# Altium PCB LEDCube.PcbDoc (part 2 of 2)
Units mil, origin at the board's own origin, x right, y up, seen from the top; angles counter-clockwise.
Board outline 4000 x 4000 mil, 4 copper layers (Top Layer, GND, +5, Bottom Layer); 176 components, 214 nets, 658 pads, 213 vias.
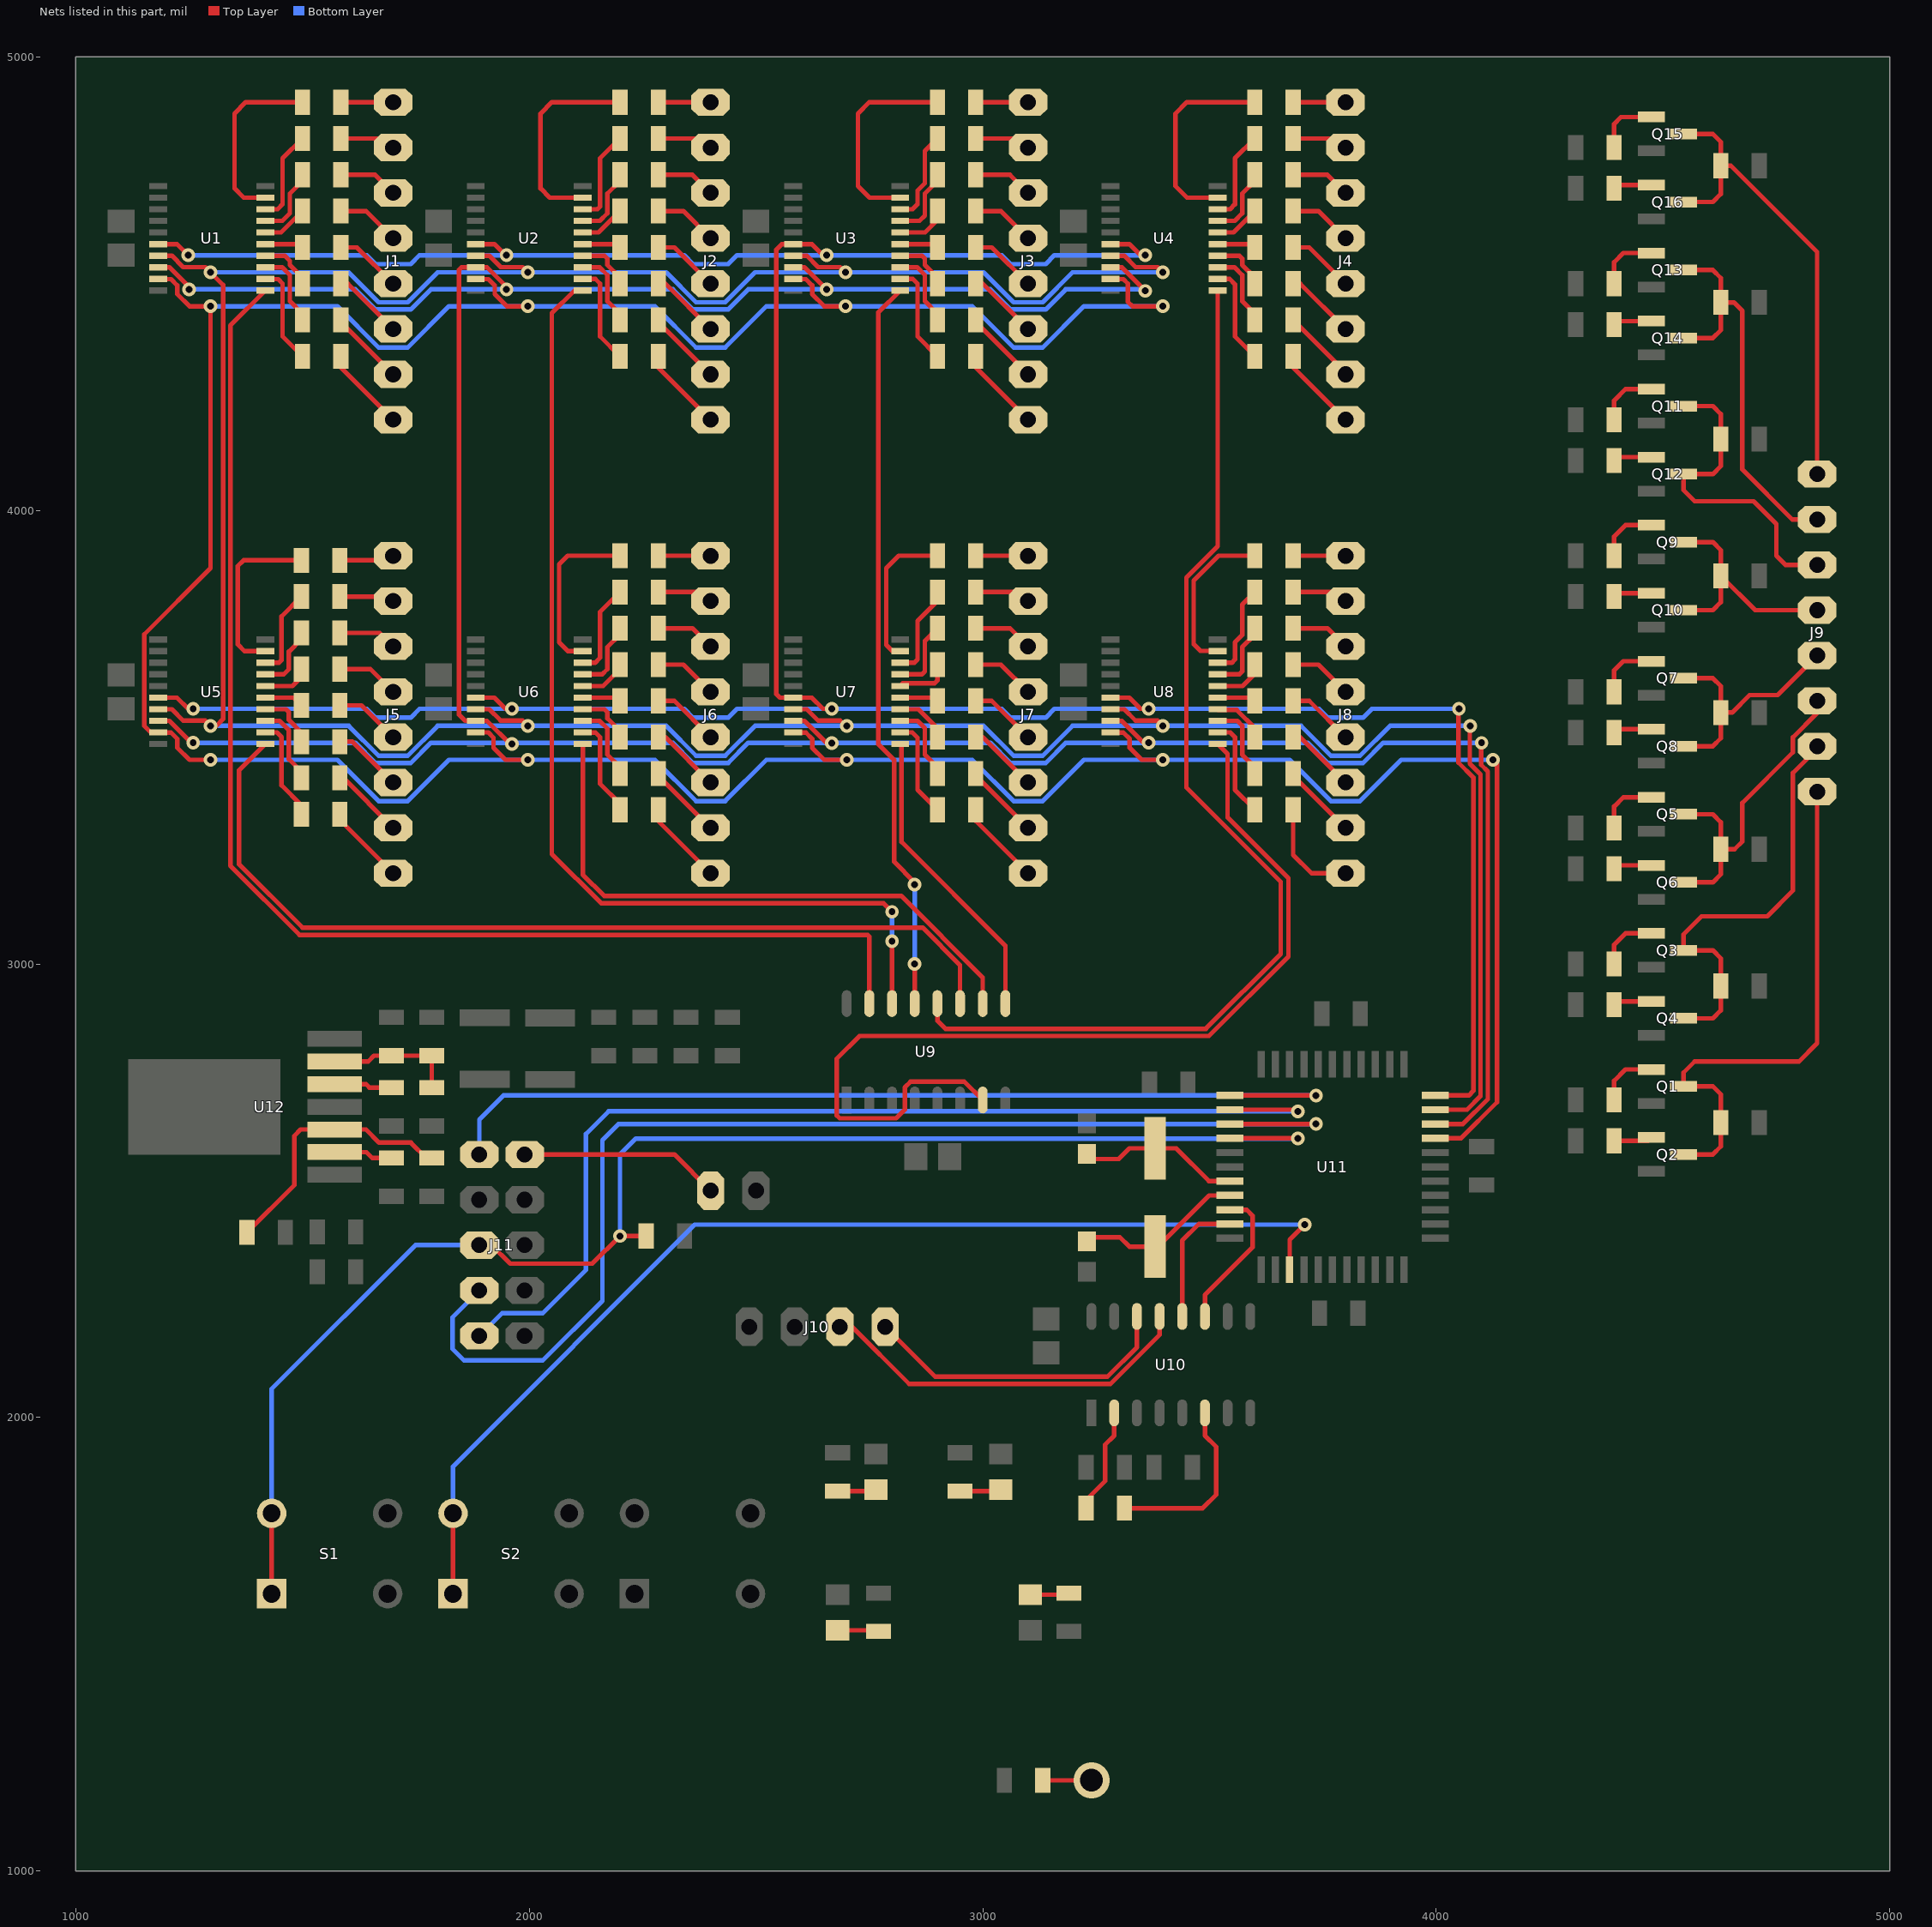
[diagram p4: the nets of this part, all layers, seen from the top]

## Via types
v1: diameter 30, hole 15, Top Layer to Bottom Layer, 205 vias
v2: diameter 80, hole 50, Top Layer to Bottom Layer, 3 vias
v3: diameter 400, hole 260, Top Layer to Bottom Layer, 2 vias
v4: diameter 100, hole 55, Top Layer to Bottom Layer, 2 vias
v5: diameter 50, hole 28, Top Layer to Bottom Layer, 1 vias

## Nets (pads, with @x,y where several pads share a name; then routed paths per layer and width w, separated by ;. In a path a pad name is that pad's centre, name@x,y a point inside that pad or via, vN(x,y) a via of type N, cw(c..) or ccw(c..) an arc to the next point about the centre after c; other vN are vias at no path point) (continued)
LINE5: U1.6 U2.6 U3.6 U4.6 U5.6 U6.6 U7.6 U8.6 U11.33 | length 7682.6
  Top Layer w10: U5.6@1181.89,3587.2 1223.09,3587.2 v1@1247.8,3562.5 ; U1.6@1181.89,4587.2 1223.09,4587.2 v1(1247.8,4562.5) ; U6.6@1881.89,3587.2 1923.09,3587.2 1947.8,3562.5 v1(1962,3562.5) ; U2.6@1881.89,4587.2 1923.09,4587.2 v1@1947.8,4562.5 ; v1@2647.5,4562.8 2623.09,4587.2 U3.6@2581.89,4587.2 2557.2,4587.2 2545,4575 2545,3595 2552.8,3587.2 U7.6@2581.89,3587.2 2623.09,3587.2 2647.8,3562.5 v1(2667,3562.5) ; U8.6@3281.89,3587.2 3323.09,3587.2 3347.8,3562.5 v1(3366,3562.5) ; U4.6@3281.89,4587.2 3323.09,4587.2 v1@3347.8,4562.5 ; U11.33@3997.76,2710 4071.82,2710 4081.82,2720 4081.82,3411.15 4049,3443.98 4049,3561.5 v1(4050,3562.5)
  Bottom Layer w10: v1(1247.8,4562.5) 1247.2,4562.5 1641.82,4562.5 1661.32,4543 1738.68,4543 1758.18,4562.5 2341.82,4562.5 2361.32,4543 2438.68,4543 2458.18,4562.5 3041.82,4562.5 3061.32,4543 3138.68,4543 3158.18,4562.5 v1(3358,4562.5) ; v1(1259,3562.5) 1641.82,3562.5 1661.32,3543 1738.68,3543 1758.18,3562.5 2341.82,3562.5 2361.32,3543 2438.68,3543 2458.18,3562.5 2650,3562.5 3041.82,3562.5 3061.32,3543 3138.68,3543 3158.18,3562.5 3347.8,3562.5 3741.82,3562.5 3761.32,3543 3838.68,3543 3858.18,3562.5 v1(4050,3562.5)
  other v1: 1950,4562.5 2656,4562.5
LINE6: U1.7 U2.7 U3.7 U4.7 U5.7 U6.7 U7.7 U8.7 U11.32 | length 8256.5
  Top Layer w10: U5.7@1181.89,3561.61 1211.92,3561.61 1237.03,3536.5 1285.71,3536.5 v1(1297.21,3525) 1310,3525 1325,3540 1325,4497.21 1285.71,4536.5 1237.03,4536.5 1211.92,4561.61 U1.7@1181.89,4561.61 ; U6.7@1881.89,3561.61 1911.92,3561.61 1937.03,3536.5 1985.71,3536.5 v1(1997.21,3525) ; U2.7@1881.89,4561.61 1911.92,4561.61 1937.03,4536.5 1985.71,4536.5 v1(1997.21,4525) ; U7.7@2581.89,3561.61 2611.92,3561.61 2637.03,3536.5 2685.71,3536.5 v1@2697.21,3525 ; U3.7@2581.89,4561.61 2611.92,4561.61 2637.03,4536.5 2685.71,4536.5 ; U8.7@3281.89,3561.61 3311.92,3561.61 3337.03,3536.5 3385.71,3536.5 v1(3397.21,3525) ; U4.7@3281.89,4561.61 3311.92,4561.61 3337.03,4536.5 3385.71,4536.5 v1(3397.21,4525) ; U11.32@3997.76,2678.5 4067.89,2678.5 4097.82,2708.44 4097.82,3417.78 4074,3441.6 v1@4074,3524
  Bottom Layer w10: v1(1297.21,3525) 1601.94,3525 1667.94,3459 1732.06,3459 1798.06,3525 v1(1997.21,3525) 2301.94,3525 2367.94,3459 2432.06,3459 2498.06,3525 v1(2700,3525) 3001.94,3525 3067.94,3459 3132.06,3459 3198.06,3525 v1(3397.21,3525) 3701.94,3525 3767.94,3459 3832.06,3459 3898.06,3525 v1(4075,3525) ; v1(1297.21,4525) 1601.94,4525 1667.94,4459 1732.06,4459 1798.06,4525 v1(1997.21,4525) 2301.94,4525 2367.94,4459 2432.06,4459 2498.06,4525 v1(2697.21,4525) 3001.94,4525 3067.94,4459 3132.06,4459 3198.06,4525 v1(3397.21,4525)
LINE7: U1.8 U2.8 U3.8 U4.8 U5.8 U6.8 U7.8 U8.8 U11.31 | length 7968.2
  Top Layer w10: U5.8@1181.89,3536.02 1206.61,3536.02 1250,3492.63 v1@1250,3487.5 ; U1.8@1181.89,4536.02 1206.61,4536.02 1250,4492.63 v1(1250,4487.5) ; v1(1950,4487.5) 1950,4492.63 1906.61,4536.02 U2.8@1881.89,4536.02 1851.02,4536.02 1845,4530 1845,3550 1858.98,3536.02 U6.8@1881.89,3536.02 1906.61,3536.02 v1@1959.81,3482.81 ; U7.8@2581.89,3536.02 2606.61,3536.02 2655.63,3487 v1(2667,3487) ; U3.8@2581.89,4536.02 2606.61,4536.02 v1@2650,4492.63 ; U8.8@3281.89,3536.02 3306.61,3536.02 3354.63,3488 v1(3366,3488) ; U4.8@3281.89,4536.02 3306.61,4536.02 3350,4492.63 v1@3350,4487.5 ; U11.31@3997.76,2647.01 4059.02,2647.01 4113.82,2701.81 4113.82,3424.41 4099,3439.23 4099,3486.5 v1(4100,3487.5)
  Bottom Layer w10: v1(1250,4487.5) 1247.2,4487.5 1616.82,4487.5 1661.32,4443 1738.68,4443 1783.18,4487.5 2316.82,4487.5 2361.32,4443 2438.68,4443 2483.18,4487.5 3016.82,4487.5 3061.32,4443 3138.68,4443 3183.18,4487.5 3354.5,4487.5 v1(3358,4484) ; v1@1259,3487.5 1616.82,3487.5 1661.32,3443 1738.68,3443 1783.18,3487.5 2316.82,3487.5 2361.32,3443 2438.68,3443 2483.18,3487.5 v1@2666.5,3487.5 ; v1(2667,3487) v1@2666.5,3487.5 ; v1(4100,3487.5) 3883.18,3487.5 3838.68,3443 3761.32,3443 3716.82,3487.5 3183.18,3487.5 3138.68,3443 3061.32,3443 3016.82,3487.5 v1@2666.5,3487.5
  other v1: 1962,3485 1259,3488 2656,4487
LINE8: U1.9 U2.9 U3.9 U4.9 U5.9 U6.9 U7.9 U8.9 U11.30 | length 8632.1
  Top Layer w10: U1.9@1181.89,4510.43 1182.32,4510 1210,4510 1224,4496 1224,4476.73 1250.73,4450 v1(1297.21,4450) 1297.21,3872.61 1151.2,3726.6 1151.2,3524.57 1165.35,3510.43 U5.9@1181.89,3510.43 1182.32,3510 1210,3510 1224,3496 1224,3476.73 1250.73,3450 v1(1297.21,3450) ; U6.9@1881.89,3510.43 1909.57,3510.43 1921.2,3498.8 1921.2,3476.73 1947.93,3450 v1(1997.21,3450) ; U2.9@1882.32,4510 1910,4510 1924,4496 1924,4476.73 1950.73,4450 v1(1997.21,4450) ; U7.9@2581.89,3510.43 2582.32,3510 2610,3510 2624,3496 2624,3476.73 2650.73,3450 v1@2697.21,3450 ; U3.9@2581.89,4510.43 2582.32,4510 2610,4510 2624,4496 2624,4476.73 2650.73,4450 v1(2697.21,4450) ; U8.9@3281.89,3510.43 3282.32,3510 3310,3510 3324,3496 3324,3476.73 3350.73,3450 v1(3397.21,3450) ; U4.9@3281.89,4510.43 3282.32,4510 3310,4510 3320,4500 3320,4460 3330,4450 v1(3397.21,4450) ; U11.30@3997.76,2615.51 4054.51,2615.51 4134,2695 4134,3441 v1(4125,3450)
  Bottom Layer w10: v1(1297.21,3450) 1576.94,3450 1667.94,3359 1732.06,3359 1823.06,3450 2276.94,3450 2367.94,3359 2432.06,3359 2523.06,3450 v1(2700,3450) 2976.94,3450 3067.94,3359 3132.06,3359 3223.06,3450 v1(3397.21,3450) 3676.94,3450 3767.94,3359 3832.06,3359 3923.06,3450 v1(4125,3450) ; v1(1297.21,4450) 1576.94,4450 1667.94,4359 1732.06,4359 1823.06,4450 v1(1997.21,4450) 2276.94,4450 2367.94,4359 2432.06,4359 2523.06,4450 v1(2697.21,4450) 2976.94,4450 3067.94,4359 3132.06,4359 3223.06,4450 v1(3397.21,4450)
MISO: J11.5 U11.2 | length 2332.3
  Top Layer w10: U11.2@3545,2678.5 v1@3691.5,2678.5
  Bottom Layer w10: J11.5@1890,2180 1940,2230 2030,2230 2125,2325 2125,2625 2175,2675 v1(3695,2675)
MOSI: J11.1 U11.1 | length 2134
  Top Layer w10: U11.1@3545,2710 v1(3735,2710)
  Bottom Layer w10: J11.1@1890,2580 1890,2657 1943,2710 v1(3735,2710)
NetC28_2: C28.2 R95.2 R97.1 U12.6 | length 289.8
  Top Layer w10: U12.6@1571,2785 1645,2785 1657.8,2797.8 C28.2@1696,2797.8 R95.2@1785,2797.8 R97.1@1785,2727.32
NetC29_2: C29.2 U12.5 | length 128.2
  Top Layer w10: U12.5@1571,2735 1640,2735 1647.68,2727.32 C29.2@1696,2727.32
NetJ1_1: J1.1 R1.2 | length 115.4
  Top Layer w10: R1.2@1584.65,4900 J1.1@1700,4900
NetJ1_2: J1.2 R5.2 | length 123.6
  Top Layer w10: R5.2@1584.65,4820 1680,4820 J1.2@1700,4800
NetJ1_3: J1.3 R9.2 | length 131.9
  Top Layer w10: R9.2@1584.65,4740 1660,4740 J1.3@1700,4700
NetJ1_4: J1.4 R13.2 | length 140.2
  Top Layer w10: R13.2@1584.65,4660 1640,4660 J1.4@1700,4600
NetJ1_5: J1.5 R17.2 | length 148.5
  Top Layer w10: R17.2@1584.65,4580 1620,4580 J1.5@1700,4500
NetJ1_6: J1.6 R21.2 | length 156.8
  Top Layer w10: R21.2@1584.65,4500 1600,4500 J1.6@1700,4400
NetJ1_7: J1.7 R25.2 | length 167.8
  Top Layer w10: R25.2@1584.65,4420 1584.65,4415.35 J1.7@1700,4300
NetJ1_8: J1.8 R29.2 | length 187.8
  Top Layer w10: R29.2@1584.65,4340 1584.65,4315.35 J1.8@1700,4200
NetJ2_1: J2.1 R2.2 | length 115.4
  Top Layer w10: R2.2@2284.65,4900 J2.1@2400,4900
NetJ2_2: J2.2 R6.2 | length 95.4
  Top Layer w10: R6.2@2284.65,4820 J2.2@2380,4820
NetJ2_3: J2.3 R10.2 | length 131.9
  Top Layer w10: R10.2@2284.65,4740 2360,4740 J2.3@2400,4700
NetJ2_4: J2.4 R14.2 | length 140.2
  Top Layer w10: R14.2@2284.65,4660 2340,4660 J2.4@2400,4600
NetJ2_5: J2.5 R18.2 | length 148.5
  Top Layer w10: R18.2@2284.65,4580 2320,4580 J2.5@2400,4500
NetJ2_6: J2.6 R22.2 | length 156.8
  Top Layer w10: R22.2@2284.65,4500 2300,4500 J2.6@2400,4400
NetJ2_7: J2.7 R26.2 | length 167.8
  Top Layer w10: R26.2@2284.65,4420 2284.65,4415.35 J2.7@2400,4300
NetJ2_8: J2.8 R30.2 | length 187.8
  Top Layer w10: R30.2@2284.65,4340 2284.65,4315.35 J2.8@2400,4200
NetJ3_1: J3.1 R3.2 | length 115.4
  Top Layer w10: R3.2@2984.65,4900 J3.1@3100,4900
NetJ3_2: J3.2 R7.2 | length 95.4
  Top Layer w10: R7.2@2984.65,4820 J3.2@3080,4820
NetJ3_3: J3.3 R11.2 | length 131.9
  Top Layer w10: R11.2@2984.65,4740 3060,4740 J3.3@3100,4700
NetJ3_4: J3.4 R15.2 | length 140.2
  Top Layer w10: R15.2@2984.65,4660 3040,4660 J3.4@3100,4600
NetJ3_5: J3.5 R19.2 | length 148.5
  Top Layer w10: R19.2@2984.65,4580 3020,4580 J3.5@3100,4500
NetJ3_6: J3.6 R23.2 | length 156.8
  Top Layer w10: R23.2@2984.65,4500 3000,4500 J3.6@3100,4400
NetJ3_7: J3.7 R27.2 | length 167.8
  Top Layer w10: R27.2@2984.65,4420 2984.65,4415.35 J3.7@3100,4300
NetJ3_8: J3.8 R31.2 | length 187.8
  Top Layer w10: R31.2@2984.65,4340 2984.65,4315.35 J3.8@3100,4200
NetJ4_1: J4.1 R4.2 | length 115.4
  Top Layer w10: R4.2@3684.65,4900 J4.1@3800,4900
NetJ4_2: J4.2 R8.2 | length 95.4
  Top Layer w10: R8.2@3684.65,4820 J4.2@3780,4820
NetJ4_3: J4.3 R12.2 | length 131.9
  Top Layer w10: R12.2@3684.65,4740 3760,4740 J4.3@3800,4700
NetJ4_4: J4.4 R16.2 | length 140.2
  Top Layer w10: R16.2@3684.65,4660 3740,4660 J4.4@3800,4600
NetJ4_5: J4.5 R20.2 | length 148.5
  Top Layer w10: R20.2@3684.65,4580 3720,4580 J4.5@3800,4500
NetJ4_6: J4.6 R24.2 | length 156.8
  Top Layer w10: R24.2@3684.65,4500 3700,4500 J4.6@3800,4400
NetJ4_7: J4.7 R28.2 | length 167.8
  Top Layer w10: R28.2@3684.65,4420 3800,4304.65 J4.7@3800,4300
NetJ4_8: J4.8 R32.2 | length 187.8
  Top Layer w10: R32.2@3684.65,4340 3684.65,4315.35 J4.8@3800,4200
NetJ5_1: J5.1 R33.2 | length 107.7
  Top Layer w10: R33.2@1582.32,3890 J5.1@1690,3890
NetJ5_2: J5.2 R37.2 | length 107.7
  Top Layer w10: R37.2@1582.32,3810 J5.2@1690,3810
NetJ5_3: J5.3 R41.2 | length 130.1
  Top Layer w10: R41.2@1582.32,3730 1670,3730 J5.3@1700,3700
NetJ5_4: J5.4 R45.2 | length 138.4
  Top Layer w10: R45.2@1582.32,3650 1650,3650 J5.4@1700,3600
NetJ5_5: J5.5 R49.2 | length 146.7
  Top Layer w10: R49.2@1582.32,3570 1630,3570 J5.5@1700,3500
NetJ5_6: J5.6 R53.2 | length 155
  Top Layer w10: R53.2@1582.32,3490 1610,3490 J5.6@1700,3400
NetJ5_7: J5.7 R57.2 | length 163.2
  Top Layer w10: R57.2@1582.32,3410 1590,3410 J5.7@1700,3300
NetJ5_8: J5.8 R61.2 | length 178.7
  Top Layer w10: R61.2@1582.32,3330 1582.32,3317.68 J5.8@1700,3200
NetJ6_1: J6.1 R34.2 | length 115.4
  Top Layer w10: R34.2@2284.65,3900 J6.1@2400,3900
NetJ6_2: J6.2 R38.2 | length 95.4
  Top Layer w10: R38.2@2284.65,3820 J6.2@2380,3820
NetJ6_3: J6.3 R42.2 | length 131.9
  Top Layer w10: R42.2@2284.65,3740 2360,3740 J6.3@2400,3700
NetJ6_4: J6.4 R46.2 | length 140.2
  Top Layer w10: R46.2@2284.65,3660 2340,3660 J6.4@2400,3600
NetJ6_5: J6.5 R50.2 | length 148.5
  Top Layer w10: R50.2@2284.65,3580 2320,3580 J6.5@2400,3500
NetJ6_6: J6.6 R54.2 | length 156.8
  Top Layer w10: R54.2@2284.65,3500 2300,3500 J6.6@2400,3400
NetJ6_7: J6.7 R58.2 | length 167.8
  Top Layer w10: R58.2@2284.65,3420 2284.65,3415.35 J6.7@2400,3300
NetJ6_8: J6.8 R62.2 | length 187.8
  Top Layer w10: R62.2@2284.65,3340 2284.65,3315.35 J6.8@2400,3200
NetJ7_1: J7.1 R35.2 | length 115.4
  Top Layer w10: R35.2@2984.65,3900 J7.1@3100,3900
NetJ7_2: J7.2 R39.2 | length 95.4
  Top Layer w10: R39.2@2984.65,3820 J7.2@3080,3820
NetJ7_3: J7.3 R43.2 | length 131.9
  Top Layer w10: R43.2@2984.65,3740 3060,3740 J7.3@3100,3700
NetJ7_4: J7.4 R47.2 | length 140.2
  Top Layer w10: R47.2@2984.65,3660 3040,3660 J7.4@3100,3600
NetJ7_5: J7.5 R51.2 | length 148.5
  Top Layer w10: R51.2@2984.65,3580 3020,3580 J7.5@3100,3500
NetJ7_6: J7.6 R55.2 | length 156.8
  Top Layer w10: R55.2@2984.65,3500 3000,3500 J7.6@3100,3400
NetJ7_7: J7.7 R59.2 | length 167.8
  Top Layer w10: R59.2@2984.65,3420 2984.65,3415.35 J7.7@3100,3300
NetJ7_8: J7.8 R63.2 | length 187.8
  Top Layer w10: R63.2@2984.65,3340 2984.65,3315.35 J7.8@3100,3200
NetJ8_1: J8.1 R36.2 | length 115.4
  Top Layer w10: R36.2@3684.65,3900 J8.1@3800,3900
NetJ8_2: J8.2 R40.2 | length 95.4
  Top Layer w10: R40.2@3684.65,3820 J8.2@3780,3820
NetJ8_3: J8.3 R44.2 | length 131.9
  Top Layer w10: R44.2@3684.65,3740 3760,3740 J8.3@3800,3700
NetJ8_4: J8.4 R48.2 | length 140.2
  Top Layer w10: R48.2@3684.65,3660 3740,3660 J8.4@3800,3600
NetJ8_5: J8.5 R52.2 | length 148.5
  Top Layer w10: R52.2@3684.65,3580 3720,3580 J8.5@3800,3500
NetJ8_6: J8.6 R56.2 | length 156.8
  Top Layer w10: R56.2@3684.65,3500 3700,3500 J8.6@3800,3400
NetJ8_7: J8.7 R60.2 | length 167.8
  Top Layer w10: R60.2@3684.65,3420 3684.65,3415.35 J8.7@3800,3300
NetJ8_8: J8.8 R64.2 | length 231.7
  Top Layer w10: R64.2@3684.65,3340 3684.65,3240.35 3725,3200 J8.8@3800,3200
NetJ9_1: J9.1 Q1.3 Q2.3 R82.2 | length 1200.5
  Top Layer w10: Q2.3@4545.43,2580 4610,2580 4627.68,2597.68 R82.2@4627.68,2650 4627.68,2712.32 4610,2730 Q1.3@4545.43,2730 4545.43,2760.43 4570,2785 4800,2785 4840,2825 J9.1@4840,3380
NetJ9_2: J9.2 Q3.3 Q4.3 R83.2 | length 950.7
  Top Layer w10: Q4.3@4545.43,2880 4610,2880 4627.68,2897.68 R83.2@4627.68,2951.43 4627.68,3012.32 4610,3030 Q3.3@4545.43,3030 4545.43,3065.43 4585,3105 4730,3105 4786.5,3161.5 4786.5,3421 4840,3474.5 J9.2@4840,3480
NetJ9_3: J9.3 Q5.3 Q6.3 R84.2 | length 726.5
  Top Layer w10: Q6.3@4545.43,3180 4610,3180 4627.68,3197.68 R84.2@4627.68,3252.86 ; Q5.3@4545.43,3330 4610,3330 4627.68,3312.32 R84.2@4627.68,3252.86 ; J9.3@4840,3580 4840,3553.06 4786.5,3499.56 4786.5,3466.5 4675,3355 4675,3270 4657.86,3252.86 R84.2@4627.68,3252.86
NetJ9_4: J9.4 Q7.3 Q8.3 R85.2 | length 558.2
  Top Layer w10: Q8.3@4545.43,3480 4610,3480 4627.68,3497.68 R85.2@4627.68,3554.29 ; Q7.3@4545.43,3630 4610,3630 4627.68,3612.32 R85.2@4627.68,3554.29 ; J9.4@4840,3680 4752.84,3592.84 4691.03,3592.84 4652.48,3554.29 R85.2@4627.68,3554.29
NetJ9_5: J9.5 Q9.3 Q10.3 R86.2 | length 537.5
  Top Layer w10: Q10.3@4545.43,3780 4610,3780 4627.68,3797.68 R86.2@4627.68,3855.71 ; Q9.3@4545.43,3930 4610,3930 4627.68,3912.32 R86.2@4627.68,3855.71 ; J9.5@4840,3780 4703.39,3780 R86.2@4627.68,3855.71
NetJ9_6: J9.6 Q11.3 Q12.3 R87.2 | length 732.9
  Top Layer w10: Q11.3@4545.43,4230 4610,4230 4627.68,4212.32 R87.2@4627.68,4157.14 4627.68,4097.68 4610,4080 Q12.3@4545.43,4080 4545.43,4044.57 4570,4020 4700,4020 4750,3970 4750,3900 4770,3880 J9.6@4840,3880
NetJ9_7: J9.7 Q13.3 Q14.3 R88.2 | length 909.4
  Top Layer w10: Q14.3@4545.43,4380 4610,4380 4627.68,4397.68 R88.2@4627.68,4458.57 ; Q13.3@4545.43,4530 4610,4530 4627.68,4512.32 R88.2@4627.68,4458.57 ; J9.7@4840,3980 4785,3980 4675,4090 4675,4440 4656.43,4458.57 R88.2@4627.68,4458.57
NetJ9_8: J9.8 Q15.3 Q16.3 R89.2 | length 1074.8
  Top Layer w10: Q16.3@4545.43,4680 4610,4680 4627.68,4697.68 R89.2@4627.68,4760 ; Q15.3@4545.43,4830 4610,4830 4627.68,4812.32 R89.2@4627.68,4760 ; J9.8@4840,4080 4840,4570 4650,4760 R89.2@4627.68,4760
NetLED1_2: LED1.2 R79.2 | length 81.6
  Top Layer w10: LED1.2@3105,1609.37 R79.2@3186.58,1609.37
NetLED2_1: LED2.1 R90.1 | length 87.5
  Top Layer w10: LED2.1@2680,1530.63 R90.1@2767.52,1530.63
NetLED3_2: LED3.2 R91.2 | length 87
  Top Layer w10: R91.2@2950,1837.68 LED3.2@3037.05,1837.68
NetLED4_2: LED4.2 R92.2 | length 81.5
  Top Layer w10: R92.2@2680,1837.68 LED4.2@2761.49,1837.68
NetQ1_1: Q1.1 R65.2 | length 135
  Top Layer w10: R65.2@4392.32,2700 4392.32,2742.32 4417.4,2767.4 Q1.1@4474.57,2767.4
NetQ2_1: Q2.1 R66.2 | length 74.8
  Top Layer w10: R66.2@4392.32,2610 Q2.1@4467.17,2610
NetQ3_1: Q3.1 R67.2 | length 135
  Top Layer w10: R67.2@4392.32,3000 4392.32,3042.32 4417.4,3067.4 Q3.1@4474.57,3067.4
NetQ4_1: Q4.1 R68.2 | length 74.8
  Top Layer w10: R68.2@4399.72,2917.4 Q4.1@4474.57,2917.4
NetQ5_1: Q5.1 R69.2 | length 137.9
  Top Layer w10: R69.2@4392.32,3300 4392.32,3347.32 4412.4,3367.4 Q5.1@4474.57,3367.4
NetQ6_1: Q6.1 R70.2 | length 74.8
  Top Layer w10: R70.2@4399.72,3217.4 Q6.1@4474.57,3217.4
NetQ7_1: Q7.1 R71.2 | length 137.9
  Top Layer w10: R71.2@4392.32,3600 4392.32,3647.32 4412.4,3667.4 Q7.1@4474.57,3667.4
NetQ8_1: Q8.1 R72.2 | length 74.8
  Top Layer w10: R72.2@4399.72,3517.4 Q8.1@4474.57,3517.4
NetQ9_1: Q9.1 R73.2 | length 135
  Top Layer w10: R73.2@4392.32,3900 4392.32,3942.32 4417.4,3967.4 Q9.1@4474.57,3967.4
NetQ10_1: Q10.1 R74.2 | length 74.8
  Top Layer w10: R74.2@4399.72,3817.4 Q10.1@4474.57,3817.4
NetQ11_1: Q11.1 R75.2 | length 135
  Top Layer w10: R75.2@4392.32,4200 4392.32,4242.32 4417.4,4267.4 Q11.1@4474.57,4267.4
NetQ12_1: Q12.1 R76.2 | length 74.8
  Top Layer w10: R76.2@4399.72,4117.4 Q12.1@4474.57,4117.4
NetQ13_1: Q13.1 R77.2 | length 137.9
  Top Layer w10: R77.2@4392.32,4500 4392.32,4547.32 4412.4,4567.4 Q13.1@4474.57,4567.4
NetQ14_1: Q14.1 R78.2 | length 74.8
  Top Layer w10: R78.2@4399.72,4417.4 Q14.1@4474.57,4417.4
NetQ15_1: Q15.1 R80.2 | length 140.8
  Top Layer w10: R80.2@4392.32,4800 4392.32,4852.32 4407.4,4867.4 Q15.1@4474.57,4867.4
NetQ16_1: Q16.1 R81.2 | length 74.8
  Top Layer w10: R81.2@4399.72,4717.4 Q16.1@4474.57,4717.4
NetR1_1: R1.1 U1.19 | length 401.9
  Top Layer w10: U1.19@1418.11,4689.57 1370.43,4689.57 1350,4710 1350,4875 1375,4900 R1.1@1500,4900
NetR2_1: R2.1 U2.19 | length 451.9
  Top Layer w10: U2.19@2118.11,4689.57 2045.43,4689.57 2025,4710 2025,4875 2050,4900 R2.1@2200,4900
NetR3_1: R3.1 U3.19 | length 449
  Top Layer w10: U3.19@2818.11,4689.57 2750.43,4689.57 2725,4715 2725,4875 2750,4900 R3.1@2900,4900
NetR4_1: R4.1 U4.19 | length 449
  Top Layer w10: U4.19@3518.11,4689.57 3450.43,4689.57 3425,4715 3425,4875 3450,4900 R4.1@3600,4900
NetR5_1: R5.1 U1.18 | length 205.8
  Top Layer w10: U1.18@1418.11,4663.98 1445.24,4663.98 1456.27,4675 1456.27,4776.27 R5.1@1500,4820
NetR6_1: R6.1 U2.18 | length 208.8
  Top Layer w10: U2.18@2118.11,4663.98 2150.24,4663.98 2156.27,4670 2156.27,4776.27 R6.1@2200,4820
NetR7_1: R7.1 U3.18 | length 205.8
  Top Layer w10: U3.18@2818.11,4663.98 2845.24,4663.98 2856.27,4675 2856.27,4705.19 2872.27,4721.19 2872.27,4792.27 R7.1@2900,4820
NetR8_1: R8.1 U4.18 | length 205.8
  Top Layer w10: U4.18@3518.11,4663.98 3545.24,4663.98 3556.27,4675 3556.27,4776.27 R8.1@3600,4820
NetR9_1: R9.1 U1.17 | length 157.5
  Top Layer w10: U1.17@1418.11,4638.38 1455.65,4638.38 1472.27,4655 1472.27,4698.56 1500,4726.29 R9.1@1500,4740
NetR10_1: R10.1 U2.17 | length 143.8
  Top Layer w10: U2.17@2118.11,4638.38 2155.65,4638.38 2172.27,4655 2172.27,4698.56 R10.1@2200,4726.29
NetR11_1: R11.1 U3.17 | length 160.5
  Top Layer w10: U3.17@2818.11,4638.38 2860.65,4638.38 2872.27,4650 2872.27,4698.56 2900,4726.29 R11.1@2900,4740
NetR12_1: R12.1 U4.17 | length 143.8
  Top Layer w10: U4.17@3518.11,4638.38 3555.65,4638.38 3572.27,4655 3572.27,4698.56 R12.1@3600,4726.29
NetR13_1: R13.1 U1.16 | length 101.4
  Top Layer w10: U1.16@1418.11,4612.79 1452.79,4612.79 R13.1@1500,4660
NetR14_1: R14.1 U2.16 | length 101.4
  Top Layer w10: U2.16@2118.11,4612.79 2152.79,4612.79 R14.1@2200,4660
NetR15_1: R15.1 U3.16 | length 93.2
  Top Layer w10: U3.16@2818.11,4612.79 2872.79,4612.79 R15.1@2900,4640
NetR16_1: R16.1 U4.16 | length 101.4
  Top Layer w10: U4.16@3518.11,4612.79 3552.79,4612.79 R16.1@3600,4660
NetR17_1: R17.1 U1.15 | length 74.7
  Top Layer w10: U1.15@1418.11,4587.2 R17.1@1492.8,4587.2
NetR18_1: R18.1 U2.15 | length 74.7
  Top Layer w10: U2.15@2118.11,4587.2 R18.1@2192.8,4587.2
NetR19_1: R19.1 U3.15 | length 74.7
  Top Layer w10: U3.15@2818.11,4587.2 R19.1@2892.8,4587.2
NetR20_1: R20.1 U4.15 | length 74.7
  Top Layer w10: U4.15@3518.11,4587.2 R20.1@3592.8,4587.2
NetR21_1: R21.1 U1.14 | length 120.5
  Top Layer w10: U1.14@1418.11,4561.61 1460.66,4561.61 1472.27,4550 1472.27,4541.44 1500,4513.71 R21.1@1500,4500
NetR22_1: R22.1 U2.14 | length 109.7
  Top Layer w10: U2.14@2118.11,4561.61 2165.66,4561.61 2172.27,4555 2172.27,4541.44 R22.1@2200,4513.71
NetR23_1: R23.1 U3.14 | length 109.7
  Top Layer w10: U3.14@2818.11,4561.61 2865.66,4561.61 2872.27,4555 2872.27,4541.44 R23.1@2900,4513.71
NetR24_1: R24.1 U4.14 | length 109.7
  Top Layer w10: U4.14@3518.11,4561.61 3565.66,4561.61 3572.27,4555 3572.27,4541.44 R24.1@3600,4513.71
NetR25_1: R25.1 U1.13 | length 157.9
  Top Layer w10: U1.13@1418.11,4536.02 1455.06,4536.02 1472.27,4518.81 1472.27,4461.44 R25.1@1500,4433.71
NetR26_1: R26.1 U2.13 | length 157.9
  Top Layer w10: U2.13@2118.11,4536.02 2155.06,4536.02 2172.27,4518.81 2172.27,4461.44 R26.1@2200,4433.71
NetR27_1: R27.1 U3.13 | length 157.9
  Top Layer w10: U3.13@2818.11,4536.02 2855.06,4536.02 2872.27,4518.81 2872.27,4461.44 R27.1@2900,4433.71
NetR28_1: R28.1 U4.13 | length 157.9
  Top Layer w10: U4.13@3518.11,4536.02 3555.06,4536.02 3572.27,4518.81 3572.27,4461.44 R28.1@3600,4433.71
NetR29_1: R29.1 U1.12 | length 220.6
  Top Layer w10: U1.12@1418.11,4510.43 1418.54,4510 1446.27,4510 1456.27,4500 1456.27,4383.73 R29.1@1500,4340
NetR30_1: R30.1 U2.12 | length 220.6
  Top Layer w10: U2.12@2118.11,4510.43 2145.84,4510.43 2156.27,4500 2156.27,4383.73 R30.1@2200,4340
NetR31_1: R31.1 U3.12 | length 220.6
  Top Layer w10: U3.12@2818.11,4510.43 2845.84,4510.43 2856.27,4500 2856.27,4383.73 R31.1@2900,4340
NetR32_1: R32.1 U4.12 | length 219.8
  Top Layer w10: U4.12@3518.11,4510.43 3544.57,4510.43 3556.27,4498.73 3556.27,4383.73 R32.1@3600,4340
NetR33_1: R33.1 U5.19 | length 385.6
  Top Layer w10: U5.19@1418.11,3689.57 1372.43,3689.57 1357,3705 1357,3877 1370,3890 R33.1@1497.68,3890
NetR34_1: R34.1 U6.19 | length 374
  Top Layer w10: U6.19@2118.11,3689.57 2085.43,3689.57 2066,3709 2066,3881 2085,3900 R34.1@2200,3900
NetR35_1: R35.1 U7.19 | length 343.7
  Top Layer w10: U7.19@2832.57,3689.57 U7.19@2818.11,3689.57 2801.57,3689.57 2787.42,3703.71 2787.42,3872.42 2815,3900 R35.1@2900,3900
NetR36_1: R36.1 U8.19 | length 357.3
  Top Layer w10: U8.19@3518.11,3689.57 3517.68,3690 3480,3690 3465,3705 3465,3845 3520,3900 R36.1@3600,3900
NetR37_1: R37.1 U5.18 | length 196.4
  Top Layer w10: U5.18@1418.11,3663.97 1447.92,3663.97 1453.94,3670 1453.94,3766.27 R37.1@1497.68,3810
NetR38_1: R38.1 U6.18 | length 205.8
  Top Layer w10: U6.18@2118.11,3663.97 2145.24,3663.97 2156.27,3675 2156.27,3776.27 R38.1@2200,3820
NetR39_1: R39.1 U7.18 | length 208
  Top Layer w10: U7.18@2818.11,3663.97 2848.97,3663.97 2856.27,3671.27 2856.27,3756.12 2900,3799.85 R39.1@2900,3820
NetR40_1: R40.1 U8.18 | length 208
  Top Layer w10: U8.18@3518.11,3663.97 3548.97,3663.97 3556.27,3671.27 3556.27,3709 3572.27,3725 3572.27,3792.27 R40.1@3600,3820
NetR41_1: R41.1 U5.17 | length 148.1
  Top Layer w10: U5.17@1418.11,3638.38 1458.33,3638.38 1469.94,3650 1469.94,3688.56 1497.68,3716.29 R41.1@1497.68,3730
NetR42_1: R42.1 U6.17 | length 146.7
  Top Layer w10: U6.17@2118.11,3638.38 2160.65,3638.38 2172.27,3650 2172.27,3698.56 R42.1@2200,3726.29
NetR43_1: R43.1 U7.17 | length 163.4
  Top Layer w10: U7.17@2818.11,3638.38 2865.65,3638.38 2872.27,3645 2872.27,3712.27 R43.1@2900,3740
NetR44_1: R44.1 U8.17 | length 163.4
  Top Layer w10: U8.17@3518.11,3638.38 3565.65,3638.38 3572.27,3645 3572.27,3698.56 3600,3726.29 R44.1@3600,3740
NetR45_1: R45.1 U5.16 | length 105.1
  Top Layer w10: U5.16@1418.11,3612.79 1477.79,3612.79 1497.68,3632.68 R45.1@1497.68,3650
NetR46_1: R46.1 U6.16 | length 97.3
  Top Layer w10: U6.16@2118.11,3612.79 2162.79,3612.79 R46.1@2200,3650
NetR47_1: R47.1 U7.16 | length 121.9
  Top Layer w10: U7.16@2818.11,3612.79 2823.88,3618.56 2841.3,3618.56 2876.14,3618.56 2893.56,3618.56 2900,3625 R47.1@2900,3660
NetR48_1: R48.1 U8.16 | length 113.2
  Top Layer w10: U8.16@3518.11,3612.79 3572.79,3612.79 3600,3640 R48.1@3600,3660
NetR49_1: R49.1 U5.15 | length 86.7
  Top Layer w10: U5.15@1418.11,3587.2 1480.48,3587.2 R49.1@1497.68,3570
NetR50_1: R50.1 U6.15 | length 74.7
  Top Layer w10: U6.15@2118.11,3587.2 R50.1@2192.8,3587.2
NetR51_1: R51.1 U7.15 | length 74.7
  Top Layer w10: U7.15@2818.11,3587.2 R51.1@2892.8,3587.2
NetR52_1: R52.1 U8.15 | length 74.7
  Top Layer w10: U8.15@3518.11,3587.2 R52.1@3592.8,3587.2
NetR53_1: R53.1 U5.14 | length 131.1
  Top Layer w10: U5.14@1418.11,3561.61 1463.39,3561.61 1469.94,3555.06 1469.94,3537.88 1497.68,3510.15 R53.1@1497.68,3490
NetR54_1: R54.1 U6.14 | length 109.7
  Top Layer w10: U6.14@2118.11,3561.61 2165.66,3561.61 2172.27,3555 2172.27,3541.44 R54.1@2200,3513.71
NetR55_1: R55.1 U7.14 | length 119.1
  Top Layer w10: U7.14@2818.11,3561.61 2858.39,3561.61 2900,3520 R55.1@2900,3500
NetR56_1: R56.1 U8.14 | length 116.9
  Top Layer w10: U8.14@3519.72,3560 3560.15,3560 3600,3520.15 R56.1@3600,3500
NetR57_1: R57.1 U5.13 | length 163.5
  Top Layer w10: U5.13@1418.11,3536.02 1449.18,3536.02 1469.94,3515.26 1469.94,3451.44 R57.1@1497.68,3423.71
NetR58_1: R58.1 U6.13 | length 157.9
  Top Layer w10: U6.13@2118.11,3536.02 2155.06,3536.02 2172.27,3518.81 2172.27,3461.44 R58.1@2200,3433.71
NetR59_1: R59.1 U7.13 | length 158.6
  Top Layer w10: U7.13@2818.11,3536.02 2856.25,3536.02 2872.27,3520 2872.27,3461.44 R59.1@2900,3433.71
NetR60_1: R60.1 U8.13 | length 175.4
  Top Layer w10: U8.13@3518.11,3536.02 3561.5,3536.02 3572.27,3525.26 3572.27,3461.44 3600,3433.71 R60.1@3600,3420
NetR61_1: R61.1 U5.12 | length 208.1
  Top Layer w10: U5.12@1418.11,3510.43 1443.52,3510.43 1453.94,3500 1453.94,3393.88 R61.1@1497.68,3350.15
NetR62_1: R62.1 U6.12 | length 220.6
  Top Layer w10: U6.12@2118.11,3510.43 2118.54,3510 2146.27,3510 2156.27,3500 2156.27,3397.44 2200,3353.71 R62.1@2200,3340
NetR63_1: R63.1 U7.12 | length 219.8
  Top Layer w10: U7.12@2818.11,3510.43 2844.57,3510.43 2856.27,3498.73 2856.27,3383.73 R63.1@2900,3340
NetR64_1: R64.1 U8.12 | length 220.6
  Top Layer w10: U8.12@3518.11,3510.43 3545.84,3510.43 3556.27,3500 3556.27,3383.73 R64.1@3600,3340
NetR93_1: R93.1 U12.2 | length 130.3
  Top Layer w10: U12.2@1571,2585 1641,2585 1653.8,2572.2 R93.1@1696,2572.2
NetR94_1: R94.1 R96.2 U12.3 | length 591
  Top Layer w10: R96.2@1377.68,2408 1482,2512.32 1482,2621 1496,2635 U12.3@1571,2635 1640,2635 1669,2606 1739,2606 1772.8,2572.2 R94.1@1785,2572.2
R1IN: J10.2 U10.13 | length 842.3
  Top Layer w10: J10.2@2685,2200 2711.94,2200 2837.94,2074 3281.63,2074 3390,2182.37 U10.13@3390,2222.6
RESET: J11.3 R98.1 S1.1 S1.3 U11.4 | length 3319.1
  Top Layer w10: S1.1@1432.05,1611.42 S1.3@1432.05,1788.58 ; J11.3@1910.71,2359.29 J11.3@1890,2380 1916.94,2380 1957.94,2339 2139,2339 v1(2200,2400) R98.1@2257.68,2400 ; U11.4@3545,2615.51 v1@3694.49,2615.51
  Bottom Layer w10: S1.3@1432.05,1788.58 1432.05,2063.05 1749,2380 J11.3@1890,2380 ; v1(2200,2400) 2200,2580 2235,2615 v1(3695,2615)
RS232SW: S2.1 S2.3 U11.14 | length 2491.9
  Top Layer w10: S2.1@1832.05,1611.42 S2.3@1832.05,1788.58 ; U11.14@3676.89,2326.14 3676.89,2391.89 v1(3710,2425)
  Bottom Layer w10: S2.3@1832.05,1788.58 1832.05,1892.05 2365,2425 v1(3710,2425)
RXD: U10.11 U11.9 | length 321.3
  Top Layer w10: U10.11@3490,2222.6 3490,2270 3595,2375 3595,2445 3581.97,2458.03 U11.9@3545,2458.03
SCK: J11.4 U11.3 | length 2681
  Top Layer w10: U11.3@3545,2647.01 v1(3735,2647.01)
  Bottom Layer w10: J11.4@1890,2280 1831,2221 1831,2151 1856,2126 2030.1,2126 2161.22,2257.11 2161.22,2611.22 2197.01,2647.01 v1(3735,2647.01)
SWITCH-: R99.1 | length 107.7
  Top Layer w10: R99.1@3132.32,1200 v2(3240,1200)
T1OUT: J10.1 U10.14 | length 695.1
  Top Layer w10: J10.1@2785,2200 2895,2090 3275,2090 3340,2155 U10.14@3340,2222.6
TXD: U10.12 U11.10 | length 287.5
  Top Layer w10: U10.12@3440,2222.6 3440,2390 3476.54,2426.54 U11.10@3545,2426.54
VS+: C4.2 U10.2 | length 218.1
  Top Layer w10: C4.2@3227.68,1817.68 3270,1860 3270,1940 3290,1960 U10.2@3290,2010
VS-: C4.1 U10.6 | length 405.5
  Top Layer w10: C4.1@3312.32,1800 3485,1800 3515,1830 3515,1935 3490,1960 U10.6@3490,2010
VTG: J11.6 J12.2 | length 443.1
  Top Layer w10: J11.6@1990,2580 2320,2580 J12.2@2400,2500
XTAL1: C8.1 U11.8 X1.1 | length 363.5
  Top Layer w10: C8.1@3230,2397.32 3302.68,2397.32 3323.27,2376.73 X1.1@3380,2376.73 ; X1.1@3386.73,2376.73 3499.53,2489.53 U11.8@3545,2489.53
XTAL2: C7.2 U11.7 X1.2 | length 351.9
  Top Layer w10: C7.2@3232.68,2570 3300,2570 3323.27,2593.27 X1.2@3380,2593.27 3426.73,2593.27 3498.98,2521.02 U11.7@3545,2521.02
Y0: U1.11 U9.15 | length 2921.6
  Top Layer w10: U1.11@1418.11,4484.84 1341,4407.73 1341,3216.37 1493.37,3064 2746,3064 2750,3060 U9.15@2750,2912.6
Y1: U2.11 U9.14 | length 2286.5
  Top Layer w10: U2.11@2118.11,4484.84 2099.84,4484.84 2050,4435 2050,3242.37 2158.37,3134 2781,3134 v1(2800,3115) ; U9.14@2800,2912.6 v1(2800,3050)
  Bottom Layer w10: v1(2800,3050) v1(2800,3115)
Y2: U3.11 U9.13 | length 1625.3
  Top Layer w10: U3.11@2818.11,4484.84 2770,4436.73 2770,3484.37 2805,3449.37 2805,3225 2850,3180 v1(2850,3175) ; U9.13@2850,2912.6 v1(2850,3000)
  Bottom Layer w10: v1(2850,3000) v1(2850,3175)
Y3: U4.11 U9.12 | length 2448
  Top Layer w10: U9.12@2900,2912.6 2900,2875 2918,2857 3492,2857 3657,3022 3657,3181 3449,3389 3449,3851.63 3518.11,3920.74 U4.11@3518.11,4484.84
Y4: U5.11 U9.11 | length 2055.9
  Top Layer w10: U5.11@1418.11,3484.84 1360,3426.73 1360,3220 1500,3080 2867.37,3080 2950,2997.37 U9.11@2950,2912.6
Y5: U6.11 U9.10 | length 1321.2
  Top Layer w10: U6.11@2118.11,3484.84 2118.11,3196.89 2165,3150 2820,3150 3000,2970 U9.10@3000,2912.6
Y6: U7.11 U9.9 | length 668.3
  Top Layer w10: U7.11@2818.11,3484.84 2821,3481.95 2821,3269 3050,3040 U9.9@3050,2912.6
Y7: U8.11 U9.7 | length 2150.8
  Top Layer w10: U9.7@3000,2700 2959.47,2740.53 2840.96,2740.53 2828.17,2727.74 2828.17,2678.6 2809.04,2659.47 2684.62,2659.47 2678.17,2665.92 2678.17,2790.8 2728.37,2841 3498.63,2841 3674,3016.37 3674,3189 3540,3323 3540,3462.95 U8.11@3518.11,3484.84
pads on no net: J10.3 J11.2 U10.7 U10.8 U10.9 U10.10 U11.15 U11.16
copper on no net:
  other v3: 2326,1269 3400,3100

## Polygon pours and split planes (outlines as drawn)
GND on Top Layer "Top Layer-No Net" (solid, pour order 5): 3100,2780 3490,2780 3490,2280 3100,2280
+5 on Top Layer "Top Layer-No Net 1" (solid, pour order 7): 1500,2790 1480,2810.95 1480,2978.57 1480,2989.05 1500,3010 2700,3010 2710,3010 2730,2989.05 2730,2884.29 2730,2873.81 2720,2863.33 2550,2863.33 2530,2863.33 2510,2842.38 1670,2842.38 1670,2821.43 1640,2790
+12 on Top Layer "Top Layer-No Net 1" (solid, pour order 6): 1150,2000 1600,2000 1650,2050 1660,2060 1660,2440 1660,2520 1640,2540 1520,2540 1510,2540 1500,2530 1500,2490 1510,2480 1560,2480 1570,2470 1570,2260 1560,2250 1150,2250 1140,2240 1140,2010
GND on GND (split plane): 4979.9,1020.1 1020.1,1020.1 1020.1,4979.9 4979.9,4979.9
+5 on +5 (split plane): 4979.9,1020.1 1020.1,1020.1 1020.1,4979.9 4979.9,4979.9

## Other copper
+5 (plane layer: these items are gaps in the copper):
  rectangle: 1110,2510 1490,2850

## Silkscreen, mask and mechanical layers (free items; w line width, h text height)
Top Overlay:
  region: 3804,1964 3908,1924 3924,1918 3940,1924 4102,1982 4285,1921 4292,1924 4396,1964 4406,1968 4396,1972 4124,2068 4104,2074 4084,2068 3804,1972 3791,1968
  region: 4124,1844 4420,1948 4428,1951 4428,1804 4236,1740 4236,1606 4252,1612 4416,1674 4428,1676 4428,1532 4132,1428 4124,1428
  region: 3781,1949 3804,1940 3900,1900 3900,1636 4084,1572 4084,1428 4076,1428 3780,1532
  text "GND" at 2440,2110 h30
  text "INT1" at 2680,1750 h30
  text "INT0" at 2940,1750 h30
  text "Reset" at 1530,1480 h30
  text "RS232" at 2020,1470 h30
  text "POWER" at 2660,1420 h30
  text "RS232" at 3080,1420 h30
  text "LED    CUBE" at 3822,1313 h100
  text "YoYoDyne" at 4730.05,1273 h30
  text "T. Topping" at 4680.06,1171 h30
  text "K. Nakano" at 4705.06,1109 h30
Bottom Overlay:
  text "\"Nemo enim fere saltat sobrius nisi forte insanit\"" at 4843,1310 h100

## Dimensions
1000,1000 to 5000,1000 on Drill Drawing
1000,5000 to 1000,1000 on Drill Drawing